# Altium PCB G30 V21.PcbDoc
Units mm, origin at the board's own origin, x right, y up, seen from the top; angles counter-clockwise.
Board outline 71.5 x 45 mm, 2 copper layers (Top Layer, Bottom Layer); 103 components, 105 nets, 360 pads, 213 vias.
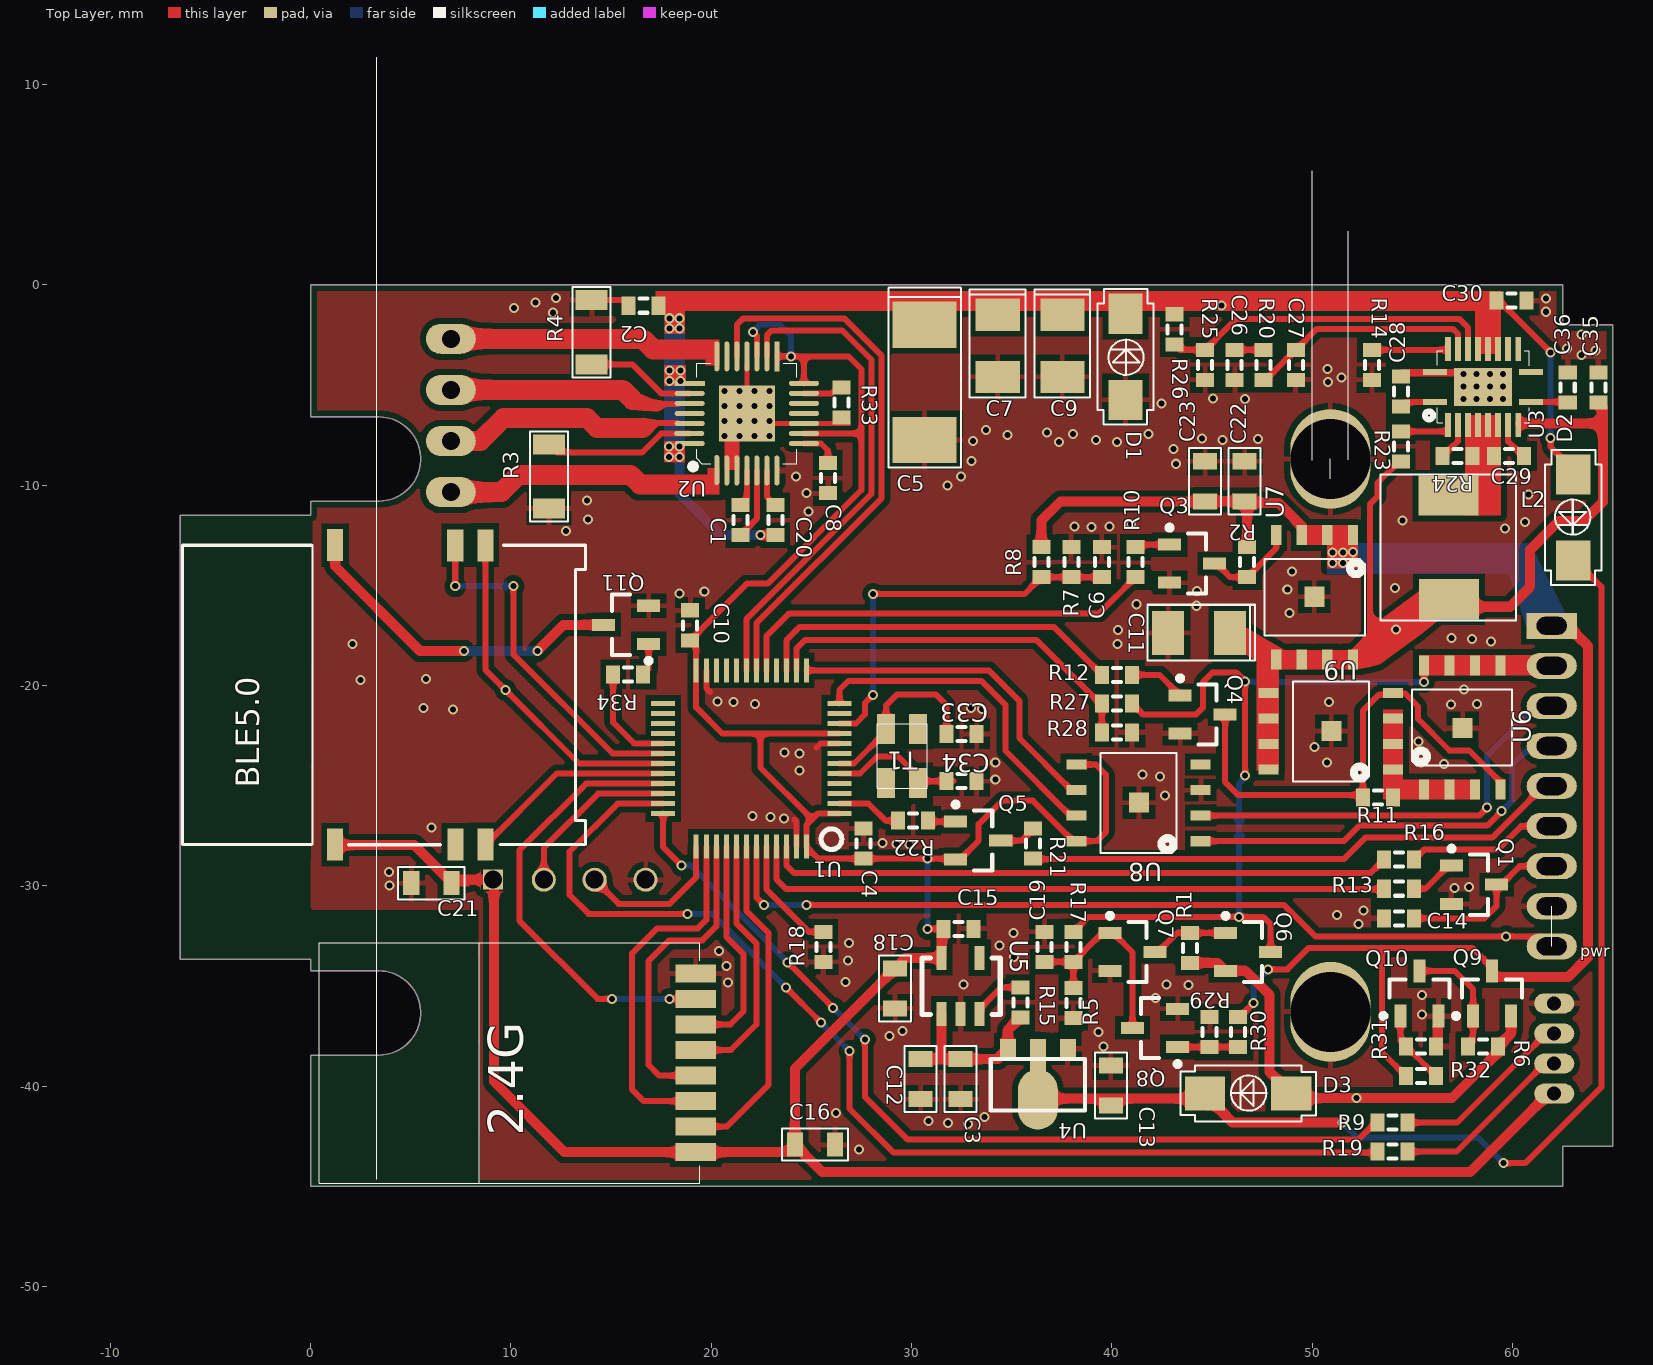
[diagram p0: Top Layer view]
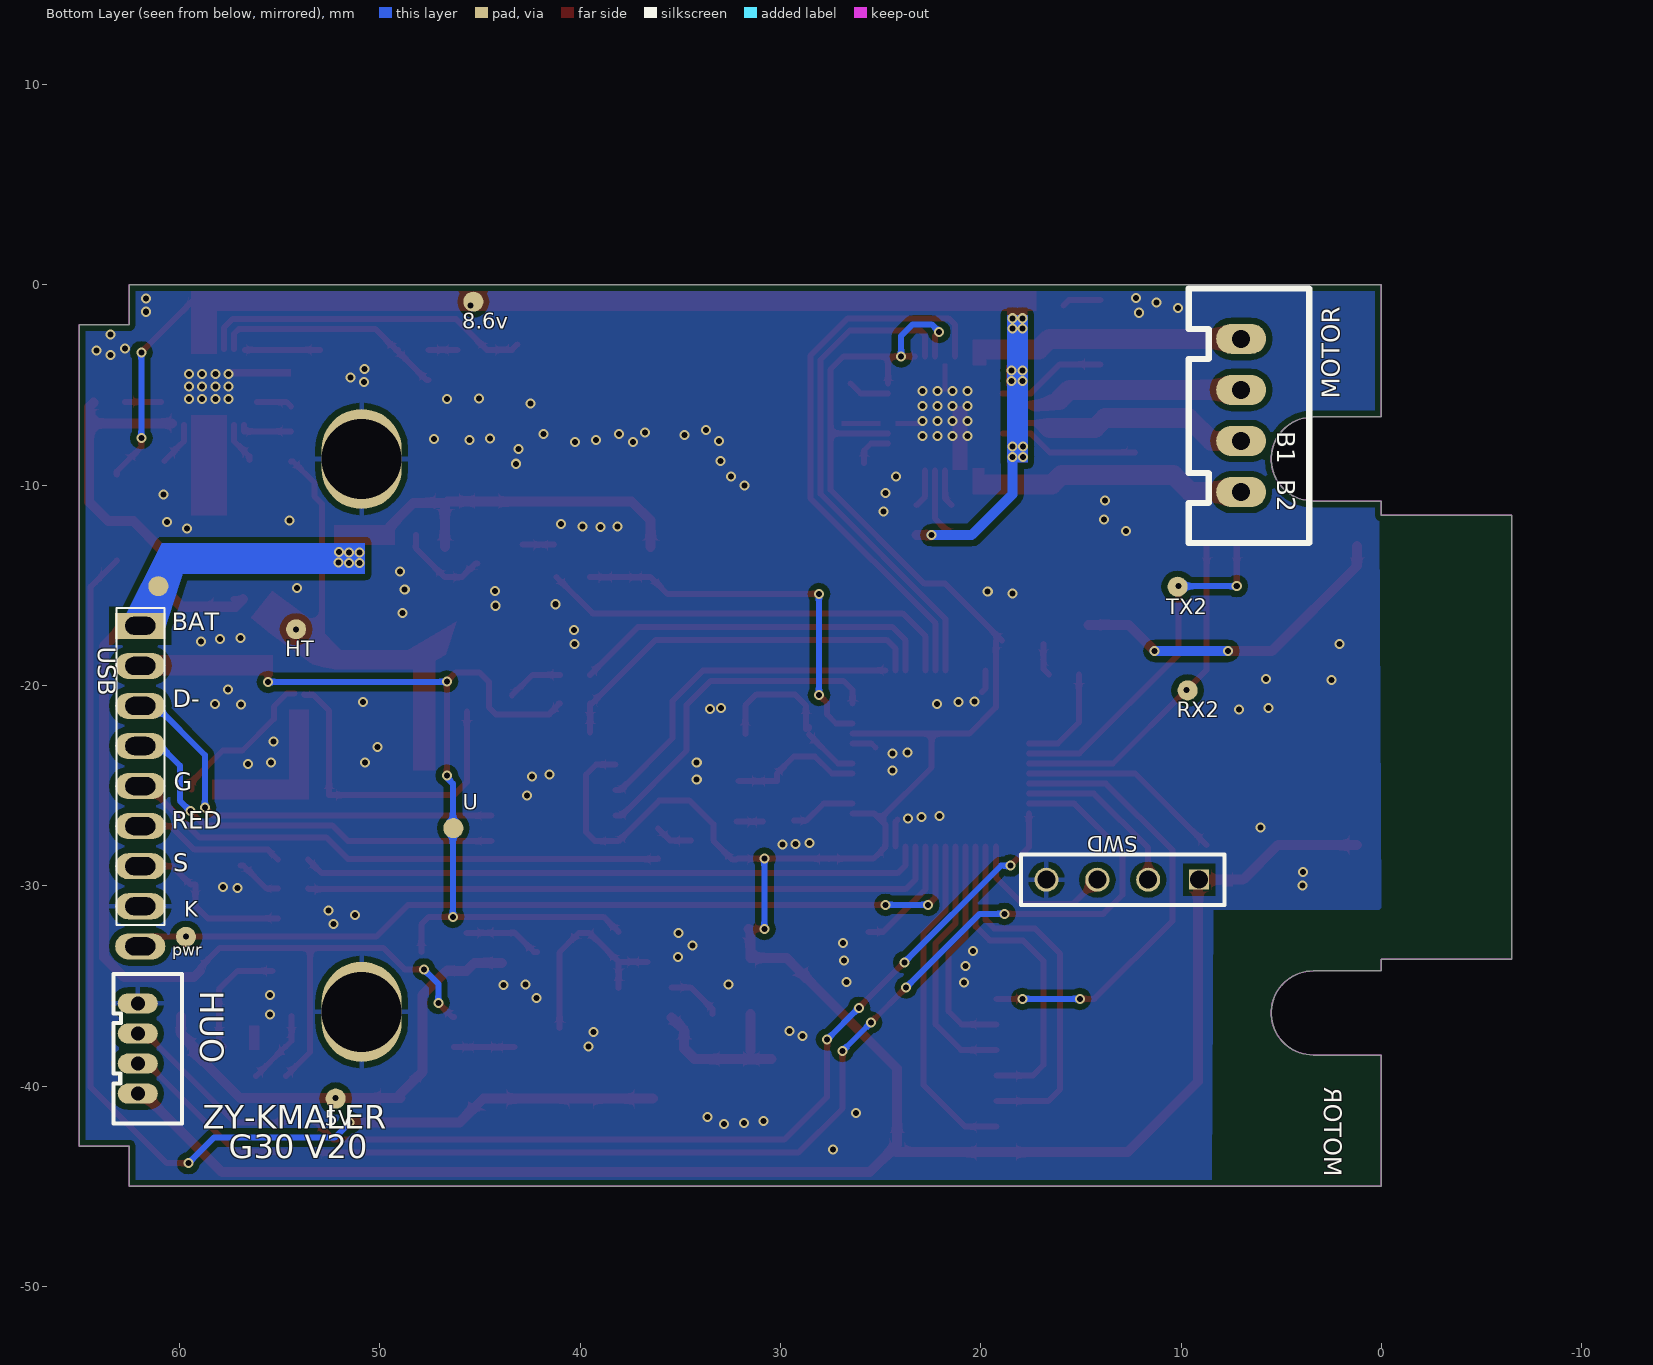
[diagram p1: Bottom Layer view, seen from below]

## Layer stack, top to bottom
Top Layer: signal copper 0.0356
Dielectric: dielectric 0.32, FR-4, Dk 4.8
Bottom Layer: signal copper 0.0356

## Board outline
0,-34.25 0,-33.675 -6.5,-33.675 -6.5,-11.5 0,-11.5 0,-10.8 3.4,-10.8 ccw(c3.4,-8.7) 3.4,-6.6 0,-6.6 0,0 62.5,0 62.5,-2 65,-2 65,-43 62.5,-43 62.5,-45 0,-45 0,-38.45 3.4,-38.45 ccw(c3.4,-36.35) 3.4,-34.25

## Design rules (kind name [scope] priority, off if disabled: settings)
Clearance Clearance_1 [All vs InPolygon] p1: gap=0.3
Clearance [All] p2: gap=0.2
PolygonConnect PolygonConnect_1 [IsVia] p1: connectstyle=Direct reliefconductorwidth=0.254 reliefentries=4 polygonreliefangle="90 Angle"
PolygonConnect [All] p2: connectstyle=Relief reliefconductorwidth=0.254 reliefentries=4 polygonreliefangle="90 Angle"
RoutingVias [All] p1: holewidth=0.711 width=1.27 viastyle="Through Hole" minholewidth=0.711 minwidth=1.27 maxholewidth=0.711 maxwidth=1.27
SilkscreenOverComponentPads SilkToSolderMaskClearance [IsPad] p1: minsilkscreentomaskgap=0.254
SolderMaskExpansion [All] p1: expansion=0.102
Width [All] p1: maxlimit=1 minlimit=0.2 preferedwidth=0.5
27 further rules are at their usual default settings.

## Classes and differential pairs
component class E310: C1 C4 C12 C22 C23 C26 C27 C28 C29 C30 C35 C36 L2 Q1 R3 R4 R7 R8 R14 R20 R23 R24 R25 R26 SWD

## Components (designator, comment, footprint, x,y, rotation, side; value= is the part's Value field where it differs from the comment)
5V "" "TEST VIA" 52.2,-38.725 r270 bottom (schematic designator nrest)
8.6v "" "TEST VIA" 45.325,1.05 r270 bottom (schematic designator nrest)
C1 "10nF/25V" J1-0603 21.45,-11.75 r270 top
C2 "100nF/25V" J1-0603 16.625,-1.05 r180 top
C3 "22uF/25V" C0805 32.45,-38.65 r270 top
C4 "100nF/25V" J1-0603 27.6,-27.9 r90 top
C5 "C型 100UF 16V" TC-C 29.1,-1.6 r270 top
C6 "10pF" J1-0603 39.5,-13.85 r90 top
C7 "b型 47UF 16V" TC-B 34.3,-1.075 r270 top
C8 "2.2uF/16V" J1-0603 25.825,-9.65 r90 top
C9 "b型 47UF 16V" TC-B 37.525,-1.075 r270 top (schematic designator C7)
C10 "10nF/25V" J1-0603 18.95,-17 r90 top (schematic designator C4)
C11 "b型 47UF 16V" TC-B 46.325,-17.375 r180 top (schematic designator C7)
C12 "22uF/25V" C0805 30.45,-38.65 r270 top
C13 "22uF/25V" C0805 39.95,-40.975 r90 top (schematic designator C12)
C14 "1uF/16V" J1-0603 54.325,-31.625 r180 top
C15 "1uF/25V" J1-0603 32.35,-32.15 r0 top (schematic designator C1)
C16 "22uF/25V" C0805 26.175,-42.925 r180 top (schematic designator C12)
C18 "22uF/25V" C0805 29.175,-36.125 r90 top (schematic designator C12)
C19 "10nF/25V" J1-0603 36.625,-33.05 r90 top (schematic designator C1)
C20 "100nF/25V" J1-0603 23.2,-11.75 r90 top (schematic designator C1)
C21 "22uF/25V" C0805 7.025,-29.875 r180 top (schematic designator C12)
C22 "22uF/25V" C0805 46.625,-10.812 r90 top
C23 "22uF/25V" C0805 44.65,-10.812 r90 top
C26 "1nF/25V" J1-0603 46.125,-4 r270 top
C27 "10pF/16V" J1-0603 49.175,-4 r270 top
C28 "2.2uF/16V" J1-0603 54.425,-5.325 r90 top
C29 "100nF/25V" J1-0603 59.825,-8.55 r0 top
C30 "1uF/25V" J1-0603 59.95,-0.8 r0 top
C33 "20pF/16V" J1-0603 32.5,-22.425 r180 top (schematic designator C10)
C34 "20pF/16V" J1-0603 32.5,-24.775 r180 top (schematic designator C10)
C35 "100nF/25V" J1-0603 64.275,-5.125 r90 top
C36 "47nF/25V" J1-0603 62.75,-5.125 r270 top
D1 "SMJ8.5A" SMA 37.55,-8.6 r90 top
D2 "SMJ8.5A" SMA 66.15,-6.625 r270 top (schematic designator D1)
D3 "SMJ8.5A" SMA 51.8,-43.5 r180 top (schematic designator D1)
HT "" "TEST VIA" 54.175,-15.3 r270 bottom (schematic designator nrest)
HUO "K" ZH1.5-4P 62.075,-35.875 r270 bottom
K "" "TEST VIA" 59.671,-30.65 r270 bottom (schematic designator nrest)
L2 "5.6uH/6A" L0603 64.975,-15.475 r180 top
MOTOR "K" HEADER2.54-4P 3.625,-12.9 r90 bottom
nrest "" "TEST VIA" 61.05,-13.15 r270 bottom
Q1 "S8050" SOT-23_N 58.075,-29.95 r0 top
Q3 "SS8050" SOT-23_N 44,-13.925 r0 top (schematic designator Q1)
Q4 "S8050" SOT-23_N 44.525,-21.45 r0 top (schematic designator Q1)
Q5 "A03401" SOT-23_N 33.325,-27.75 r0 top (schematic designator Q1)
Q6 "A03401" SOT-23_N 46.8,-33.3 r0 top (schematic designator Q1)
Q7 "SS8050" SOT-23_N 41.025,-33.3 r0 top (schematic designator Q1)
Q8 "SS8050" SOT-23_N 42.15,-37.1 r180 top (schematic designator Q1)
Q9 "A03401" SOT-23_N 58.975,-35.375 r90 top (schematic designator Q1)
Q10 "SS8050" SOT-23_N 55.35,-35.375 r90 top (schematic designator Q1)
Q11 "SS8050" SOT-23_N 15.75,-16.975 r180 top (schematic designator Q1)
R1 "100K" J1-0603 43.9,-33.1 r90 top (schematic designator R13)
R2 "100K" J1-0603 46.75,-13.85 r90 top (schematic designator R13)
R3 "0.33R" R1206 11.9,-10.375 r90 top
R4 "0.33R" R1206 14.025,-3.175 r90 top
R5 "220K" J1-0603 38.075,-35.85 r90 top (schematic designator R13)
R6 "100K" J1-0603 58.525,-38.025 r180 top (schematic designator R13)
R7 "22K" J1-0603 37.975,-13.85 r270 top
R8 "100K" J1-0603 36.475,-13.85 r90 top
R9 "100K" J1-0603 54,-41.825 r180 top (schematic designator R7)
R10 "1K" J1-0603 41.175,-13.85 r90 top (schematic designator R13)
R11 "100K" J1-0603 53.275,-25.6 r0 top (schematic designator R13)
R12 "1K" J1-0603 40.25,-19.475 r0 top (schematic designator R13)
R13 "1K" J1-0603 54.325,-30.15 r0 top
R14 "560K" J1-0603 52.975,-4 r270 top
R15 "1K" J1-0603 35.425,-35.825 r270 top (schematic designator R13)
R16 "1K" J1-0603 54.325,-28.7 r180 top (schematic designator R13)
R17 "1M" J1-0603 38.075,-33.05 r270 top (schematic designator R13)
R18 "100K" J1-0603 25.6,-33.05 r90 top (schematic designator R13)
R19 "100K" J1-0603 54,-43.275 r180 top (schematic designator R7)
R20 "24.9K" J1-0603 47.575,-4 r90 top
R21 "160R" J1-0603 36.05,-27.9 r90 top (schematic designator R13)
R22 "1K" J1-0603 30.075,-26.75 r180 top (schematic designator R13)
R23 "1M" J1-0603 54.425,-8.075 r90 top
R24 "270K" J1-0603 57.25,-8.55 r180 top
R25 "40.2K" J1-0603 44.65,-4 r90 top
R26 "270K" J1-0603 43.125,-2.225 r90 top
R27 "100K" J1-0603 40.25,-20.9 r180 top (schematic designator R13)
R28 "200K" J1-0603 40.25,-22.35 r0 top (schematic designator R13)
R29 "220K" J1-0603 44.875,-37.3 r90 top (schematic designator R13)
R30 "1M" J1-0603 46.3,-37.3 r90 top (schematic designator R13)
R31 "220K" J1-0603 55.425,-38.025 r0 top (schematic designator R13)
R32 "1M" J1-0603 55.425,-39.5 r0 top (schematic designator R13)
R33 "1K" J1-0603 26.5,-5.875 r270 top (schematic designator R5)
R34 "1K" J1-0603 15.85,-19.45 r180 top (schematic designator R13)
RX2 "" "TEST VIA" 9.675,-18.35 r270 bottom (schematic designator nrest)
SWD "" HDR1X4 9.1,-29.7 r0 bottom
T1 "3225" CRYSTAL-SMT 30.775,-21.925 r270 top
TX2 "" "TEST VIA" 10.175,-13.175 r270 bottom (schematic designator nrest)
U "" "TEST VIA" 46.325,-25.225 r270 bottom (schematic designator nrest)
U1 "STM32F030C8" ST-LQFP48 25.975,-27.65 r180 top
U2 "TMC2208-28P" QFN28 25.15,-8.925 r180 top
U3 "TPS61088" TPS61088R-21P 60.825,-3.3 r270 top (schematic designator U6)
U4 "HT7560" SOT89 39.05,-38.15 r180 top
U5 "K" SOT23-5 30.325,-35.6 r0 top
U6 "K" SOP-8 54.975,-24.875 r90 top
U7 "K" SOP-8 52.625,-12.825 r270 top
U8 "K" SOP-8 44.1,-28.375 r180 top
U9 "K" SOP-8 53.7,-24.8 r180 top
? "K" HEARDER2.0-8P 61.15,-15.45 r270 bottom
? "K" SI24R1 7.425,-44.85 r90 top
? "K" JDY-25M-7 -6.375,-27.95 r90 top

## Footprints (in the part's own frame and the unit in brackets; to place one, negate y for a bottom-side part, rotate by r counter-clockwise, add the part's x,y. Pads: shape width x height; smd on the part's side, far side on the other; paste and mask are expansions set on the pad)
C0805 [mm]
  rect 0.8x1.2 smd: 1(2,0) 2(0,0)
  silkscreen extent -0.65,-0.8 2.65,0.8, body extent -0.3,-0.8 2.27,0.8, height 1.3
CRYSTAL-SMT [mm]
  rect 1.5x0.9 smd: 0(0.25,-0.45) 0(2.95,-2.05) 1(2.95,-0.45) 2(0.25,-2.05)
  silkscreen extent 0,-2.5 3.2,0
HDR1X4 [mm] "Connector; Header; 4 Position"
  rect 1x1 hole 0.9: 1(0,0)
  round 1.2 hole 0.9: 2(2.54,0) 3(5.08,0) 4(7.62,0)
  silkscreen extent -1.27,-1.27 8.89,1.27
HEADER2.54-4P [mm]
  oval 1.5x2.5 hole 0.9: 1(2.55,3.375) 2(5.1,3.375) 3(7.65,3.375) 4(10.2,3.375)
  silkscreen extent 0,-0.07 12.7,5.93, body extent 0,-0.05 12.7,5.92, height 7
HEARDER2.0-8P [mm]
  rect 1.3x2.5 hole 0.9 slot 1.5 at 90 deg: 1(1.575,-0.8)
  oval 1.3x2.5 hole 0.9 slot 1.5 at 90 deg: 2(3.575,-0.8) 3(5.575,-0.8) 4(7.575,-0.8) 5(9.575,-0.8) 6(11.575,-0.8) 7(13.575,-0.8) 8(15.575,-0.8)
  silkscreen extent 0.68,-1.97 16.5,0.4
J1-0603 [mm] "Chip Resistor, Body 1.6x0.8mm, IPC High Density"
  rect 0.7x0.9 smd: 1(-0.75,0) 2(0.75,0)
  silkscreen extent -0.2,-0.35 0.2,0.35, body extent -0.85,-0.48 0.85,0.48, height 0.9
JDY-25M-7 [mm]
  rect 1.6x0.8 smd: 1(0.005,-7.596) 5(0,-13.6) 6(0.005,-15.096) 19(14.94,-15.096) 20(14.94,-13.596) 24(14.95,-7.6)
  silkscreen extent 0,-20.1 14.95,0.02, body extent 0,-20.1 14.95,0, height 1.6
L0603 [mm] "inductance"
  rect 3x2 smd: 1(8.15,0.225) 2(8.175,-4.95)
  silkscreen extent 4.8,-6 11.58,1.28, body extent 4.8,-6 11.58,1.28, height 2.7
QFN28 [mm]
  rect 2.8x2.8 smd: 0(3.375,-2.5)
  oval 0.25x1.5 smd: 1(4.875,0.325) 2(4.375,0.35) 3(3.875,0.35) 4(3.375,0.35) 5(2.875,0.35) 6(2.375,0.35) 7(1.875,0.35) 16(2.375,-5.35) 17(2.875,-5.35) 18(3.375,-5.35) 19(3.875,-5.35) 20(4.375,-5.35) 21(4.875,-5.35)
  oval 1.5x0.25 smd: 8(0.525,-1) 9(0.525,-1.5) 10(0.525,-2) 11(0.525,-2.5) 12(0.525,-3) 13(0.525,-3.5) 14(0.525,-4) 23(6.225,-3.5) 24(6.225,-3) 25(6.225,-2.5) 26(6.225,-2) 27(6.25,-1.5) 28(6.225,-1)
  rect 0.25x1.5 smd: 15(1.875,-5.35)
  rect 1.5x0.25 smd: 22(6.225,-4)
  silkscreen extent 0.87,-5 6.2,0.29, body extent 0.87,-5 5.87,0, height 1
R1206 [mm]
  rect 1x1.6 smd: 1(-0.8,0) 2(2.4,0)
  silkscreen extent -1.45,-0.95 3.05,0.95, body extent -1.45,-0.95 3.05,0.95, height 0.5
SI24R1 [mm]
  rect 0.9x2 smd: 1(1.55,-11.8) 2(2.825,-11.8) 3(4.1,-11.8) 4(5.375,-11.8) 5(6.65,-11.8) 6(7.925,-11.8) 7(9.2,-11.8) 8(10.475,-11.8)
  silkscreen extent 0,-12 12,7, body extent -0.03,-12 12,7.02, height 2
SMA [mm]
  rect 2x1.7 smd: 1(2.85,-3.125) 2(7.15,-3.125)
  silkscreen extent 1.63,-4.52 8.37,-1.73, body extent 2.35,-4.52 7.65,-1.73, height 1.9
SOP-8 [mm] "ESOP8L"
  rect 1x0.51 smd: 1(-0.325,-0.6) 2(-0.325,-1.875) 3(-0.325,-3.15) 4(-0.325,-4.425) 5(5.875,-4.425) 6(5.875,-3.15) 7(5.875,-1.875) 8(5.875,-0.6)
  rect 1x1 smd: 2(2.75,-2.525)
  silkscreen extent 0.87,-5 4.68,0, body extent 0.87,-5 4.68,0, height 1.75
SOT23-5 [mm]
  rect 0.5x1.2 smd: 1(1.175,-0.8) 2(2.125,-0.8) 3(3.075,-0.8) 4(3.075,2) 5(1.175,2)
  silkscreen extent 0.2,-0.82 4.1,2, body extent 0.23,-0.82 4.1,2, height 1.3
SOT89 [mm]
  rect 0.8x1 smd: 1(1.25,0) 3(4.25,0)
  oval 2x3 smd: 2(2.75,2.525)
  rect 0.8x2 smd: 2(2.75,0.5)
  silkscreen extent 0.4,0.5 5.1,3.08, body extent 0.4,0.5 5.1,3.08, height 1.4
SOT-23_N [mm] "SOT23, 3-Leads, Body 2.9x1.3mm, Pitch 0.95mm, Lead Span 2.5mm, IPC Medium Density"
  rect 1.15x0.6 smd: 1(-1.125,0.95) 2(-1.125,-0.95) 3(1.125,0)
  silkscreen extent -1.25,-1.5 0.7,1.92, body extent -0.7,-1.5 0.7,1.5, height 1.1
ST-LQFP48 [mm]
  rect 1.2x0.25 smd: 1(-0.425,-1.25) 2(-0.425,-1.75) 3(-0.425,-2.25) 4(-0.425,-2.75) 5(-0.425,-3.25) 6(-0.425,-3.75) 7(-0.425,-4.25) 8(-0.425,-4.75) 9(-0.425,-5.25) 10(-0.425,-5.75) 11(-0.425,-6.25) 12(-0.425,-6.75) 25(8.375,-6.75) 26(8.375,-6.25) 27(8.375,-5.75) 28(8.375,-5.25) 29(8.375,-4.75) 30(8.375,-4.25) 31(8.375,-3.75) 32(8.375,-3.25) 33(8.375,-2.75) 34(8.375,-2.25) 35(8.375,-1.75) 36(8.375,-1.25)
  rect 0.25x1.2 smd: 13(1.225,-8.4) 14(1.725,-8.4) 15(2.225,-8.4) 16(2.725,-8.4) 17(3.225,-8.4) 18(3.725,-8.4) 19(4.225,-8.4) 20(4.725,-8.4) 21(5.225,-8.4) 22(5.725,-8.4) 23(6.225,-8.4) 24(6.725,-8.4) 37(6.725,0.4) 38(6.225,0.4) 39(5.725,0.4) 40(5.225,0.4) 41(4.725,0.4) 42(4.225,0.4) 43(3.725,0.4) 44(3.225,0.4) 45(2.725,0.4) 46(2.225,0.4) 47(1.725,0.4) 48(1.225,0.4)
  silkscreen extent -0.54,-0.49 0.49,0.54, body extent 0.23,-7.8 7.75,-0.2, height 1.5
TC-B [mm] "Tantalum capacitor"
  rect 1.6x2.2 smd: 1(0.425,0) 2(3.525,0)
  silkscreen extent -0.82,-1.4 4.55,1.38, body extent -0.35,-1.4 4.55,1.38, height 1.65
TC-C [mm]
  rect 2.3x3.2 smd: 1(0.4,1.55) 2(6.15,1.55)
  silkscreen extent -1.45,-0.25 7.52,3.37
"TEST VIA" [mm]
  round 1 smd: 1(1.9,0)
TPS61088R-21P [mm] "TPS61088"
  rect 0.29x1.2 smd: 1(2.55,-4.7) 10(2.55,0.1) 11(1.05,0.1) 20(1.05,-4.7)
  rect 1.2x0.29 smd: 2(3.7,-4.05) 3(3.7,-3.55) 4(3.7,-3.05) 5(3.7,-2.55) 6(3.7,-2.05) 7(3.7,-1.55) 8(3.7,-1.05) 9(3.7,-0.55) 12(-0.1,-0.55) 13(-0.1,-1.05) 14(-0.1,-1.55) 15(-0.1,-2.05) 16(-0.1,-2.55) 17(-0.1,-3.05) 18(-0.1,-3.55) 19(-0.1,-4.05)
  rect 1.9x2.9 smd: 21(1.8,-2.3)
  silkscreen extent 0,-5.2 3.6,0, body extent 0,-4.6 3.6,0, height 1.1
ZH1.5-4P [mm]
  oval 1x2 hole 0.7: 0(0,0) 1(1.5,0) 2(3,0) 3(4.5,0)
  silkscreen extent -1.48,-1.2 6,2.2, body extent -1.48,-1.2 6,2.17, height 5

## Part data
5V 8.6v HT K nrest RX2 TX2 U: library part "TEST VIA"
C1 C2 C6 C8 C15 C19 C20: library part Cap, "Capacitor"
C3 C4 C10 C12 C13 C14 C16 C18 C21 C22 C23 C26 C27 C28 C29 C30 C33 C34 C35 C36: library part CAP, "Capacitor"
C5 C7 C9 C11: library part "CAPACITOR POL", "Capacitor"
D1 D2 D3: library part "Diode 1N4448", "High Conductance Fast Diode"
L2 R1 R2 R5 R6 R10 R11 R12 R13 R14 R15 R16 R17 R18 R20 R21 R22 R23 R24 R25 R26 R27 R28 R29 R30 R31 R32 R34: library part Res1, "Resistor"
Q1 Q3 Q4 Q5 Q6 Q7 Q8 Q9 Q10 Q11: library part "Header 3", "Header, 3-Pin"
R3 R4 R7 R8 R9 R19: library part RES1
R33: library part Res3, "Resistor"
SWD: library part "4 HEADER", "4 Pin Header"

## Free pads (board coordinates)
  oval 4x5 hole 4: 1(50.9,-36.3) 1(50.9,-8.7)
  oval 2.5x1.3 hole 0.9 slot 1.5 at 0 deg: 9(61.95,-33.025)

## Via types
v1: diameter 0.5, hole 0.3, Top Layer to Bottom Layer, tented both sides, 213 vias

## Nets (pads, with @x,y where several pads share a name; then routed paths per layer and width w, separated by ;. In a path a pad name is that pad's centre, name@x,y a point inside that pad or via, vN(x,y) a via of type N, cw(c..) or ccw(c..) an arc to the next point about the centre after c; other vN are vias at no path point)
3.3V: ?.1@1.221,-27.945 ?.1@19.225,-43.3 C4.1 C10.1 C15.1 C16.1 C18.1 C21.2 HUO.3 Q5.2 SWD.1 U1.1 U1.9 U1.24 U1.48 U2.9 U2.14 U2.15 U2.17 U5.5 U8.5 U8.8 | length 167.4
  Top Layer w0.3: C10.1 21.775,-14.925 22.811,-14.925 27.5,-10.236 27.5,-7.425 ; C10.1@19.25,-17.775 U1.24 19.25,-21.1 20.55,-22.4 22.45,-22.4 ; v1(22.075,-2.35) 22.275,-2.55 U2.17 ; U2.15 26.85,-3.575 27.5,-4.225 27.5,-7.425 ; U2.9 27.5,-7.425 ; U2.14 24.625,-3.575 ; U1.1 25.325,-26.4 25.038,-26.687 ; U1.9 22.45,-22.4 ; C4.1@27.575,-28.675 C4.1 ; v1(30.8,-32.15) C15.1 ; Q5.2@32.15,-28.65 C4.1 ; Q5.2 32.4,-28.7 33.35,-27.75 33.35,-26.925 34.525,-25.75 36.05,-25.75 38.075,-27.775 U8.8 39.25,-27.775 39.7,-27.325 39.7,-24.45 39.2,-23.95 U8.5 ; 22.45,-22.4 22.45,-24.1 25.038,-26.687 ; 25.038,-26.687 24.75,-26.975 U1.48 25.35,-28.65 C4.1
  Top Layer w0.5: ?.1@1.221,-27.97 5.17,-27.97 6.9,-29.7 SWD.1 9.15,-29.7 9.15,-39.775 12.675,-43.3 19.225,-43.3 C16.1@24.2,-43.3 ; C15.1 31.5,-32.25 U5.5 29.7,-33.6 C18.1 24.175,-39.125 C16.1 25.55,-44.3 57.875,-44.3 61.8,-40.375 HUO.3
  Bottom Layer w0.3: v1(22.075,-2.35) 22.45,-1.975 23.4,-1.975 23.975,-2.55 v1(23.975,-3.575) ; v1(30.8,-32.15) v1(30.8,-28.65)
ADC1: C6.1 R7.2 R8.1 U1.10 | length 19.4
  Top Layer w0.3: U1.10 27.225,-21.9 27.675,-21.45 27.675,-20.875 v1(28.075,-20.475) ; v1(28.075,-15.437) 35.637,-15.437 R8.1 R7.2 C6.1
  Bottom Layer w0.3: v1(28.075,-20.475) v1(28.075,-15.437)
BLE_GND: ?.24 Q11.3 | length 16.7
  Top Layer w0.5: ?.24@1.221,-13.035 1.221,-14.046 5.45,-18.275 v1(7.65,-18.275) ; v1(11.325,-18.275) 12.625,-16.975 Q11.3
  Bottom Layer w0.5: v1(7.65,-18.275) v1(11.325,-18.275)
CE: ?.2@19.225,-42.025 U1.42 | length 16.8
  Top Layer w0.3: ?.2@19.225,-42.025 20.775,-42.025 22.85,-39.95 22.85,-32.35 21.75,-31.25 U1.42
CS: 
CSN: ?.3@19.225,-40.75 U1.38 | length 18.3
  Top Layer w0.3: ?.3@19.225,-40.75 16.625,-40.75 16.05,-40.175 16.05,-33.375 17.3,-32.125 19.325,-32.125 19.75,-31.7 U1.38
D+: ?.4@61.95,-23.025 U8.1 | length 20.5
  Top Layer w0.3: U8.1 51.575,-27.775 52.35,-27 58.725,-27 v1(59.45,-26.275)
  Bottom Layer w0.3: v1(59.45,-26.275) 59.975,-25.75 59.975,-24 60.95,-23.025 ?.4@61.95,-23.025
D-: ?.3@61.95,-21.025 U8.2@44.425,-26.5 | length 21.3
  Top Layer w0.3: U8.2@44.425,-26.5 58.325,-26.5 v1(58.725,-26.1)
  Bottom Layer w0.3: v1(58.725,-26.1) 58.725,-23.475 61.175,-21.025 ?.3@61.95,-21.025
DIAG: 
DIR: U1.18 U2.19 | length 28
  Top Layer w0.3: U2.19 21.275,-2 21.6,-1.675 26.632,-1.675 28.5,-3.543 28.5,-10.65 22.25,-16.9 U1.18
EN: 
FLOW: 
GND: ?.8 C2.2 C3.1 C4.2 C5.2 C6.2 C7.2 C8.1 C9.2 C10.2 C11.2 C12.1 C13.1 C14.2 C15.2 C16.2 C18.2 C19.2 C21.1 C22.1 C23.1 C26.2 C27.2 C28.2 C30.2 C33.1 C34.1 C35.2 C36.1 D1.1 HUO.0 pad.1 Q1.2 Q3.2 Q4.2 Q7.2 Q8.2 Q10.2 Q11.2 R3.1 R4.2 R5.1 R7.1 R14.2 R18.1 R25.1 R28.2 R29.2 R31.2 R33.2 SWD.4 U1.8 U1.23 U1.47 U2.0 U2.2 U2.3 U2.7 U2.10 U2.18 U3.20 U3.21 U4.1 U5.2 U6.2@57.5,-22.125 U7.2@50.1,-15.575 U8.2@41.35,-25.85 U8.3 U9.2@50.95,-22.275 | length 5.7
  Top Layer w0.3: R4.2 15.6,-0.775 C2.2 ; U1.23 19.75,-20.15 19.925,-20.325 ; 24.15,-26.7 24.25,-26.8 U1.47 ; 25.25,-23.1 25.45,-22.9 U1.8
  other v1: 27.375,-43.175 32.825,-41.9 31.825,-41.85 30.85,-41.75 33.65,-41.55 26.225,-41.35 39.575,-38.025 28.9,-37.5 39.325,-37.3 29.55,-37.25 55.475,-36.425 42.175,-35.6 55.475,-35.45 43.81,-34.959 32.6,-34.925 42.725,-34.925 20.825,-34.825 26.7,-34.8 20.75,-34 26.825,-33.725 35.1,-33.55 20.375,-33.25 34.375,-32.975 26.875,-32.85 35.075,-32.35 52.3,-31.9 51.225,-31.45 52.55,-31.225 57.1,-30.125 57.825,-30.075 3.95,-30 3.925,-29.325 29.9,-27.95 29.25,-27.925 28.55,-27.875 6.025,-27.1 23.625,-26.65 22.95,-26.575 22.05,-26.525 42.65,-25.5 34.175,-24.7 42.4,-24.55 41.525,-24.45 24.4,-24.25 56.575,-23.925 34.175,-23.85 50.725,-23.85 55.425,-23.85 24.4,-23.4 23.65,-23.35 50.1,-23.075 55.3,-22.8 7.1,-21.2 33.525,-21.175 5.625,-21.125 32.975,-21.125 56.925,-20.95 22.175,-20.925 58.225,-20.925 21.1,-20.825 50.825,-20.825 20.3,-20.8 57.575,-20.2 2.5,-19.725 5.75,-19.675 2.1,-17.925 40.275,-17.925 58.925,-17.8 57.975,-17.675 56.95,-17.625 40.3,-17.225 48.85,-16.375 44.225,-16.025 41.225,-15.95 18.425,-15.425 19.65,-15.325 44.25,-15.3 48.75,-15.225 54.125,-15.15 48.975,-14.325 12.75,-12.3 59.625,-12.175 38.975,-12.1 38.125,-12.075 39.875,-12.075 40.95,-11.95 60.625,-11.85 54.5,-11.775 13.85,-11.725 24.85,-11.325 13.8,-10.775 60.8,-10.475 24.75,-10.4 31.8,-10.025 24.225,-9.575 32.475,-9.575 43.2,-8.937 33,-8.8 43.075,-8.212 37.35,-7.85 40.25,-7.85 33.075,-7.8 39.2,-7.75 45.525,-7.762 47.3,-7.712 44.5,-7.687 20.65,-7.55 21.4,-7.55 22.15,-7.55 22.9,-7.55 34.775,-7.5 38.05,-7.45 41.825,-7.45 36.75,-7.375 33.725,-7.25 20.65,-6.8 21.4,-6.8 22.15,-6.8 22.9,-6.8 20.65,-6.05 21.4,-6.05 22.15,-6.05 22.9,-6.05 42.475,-5.925 46.65,-5.7 57.55,-5.7 58.2,-5.7 58.875,-5.7 59.525,-5.7 45.05,-5.675 20.65,-5.3 21.4,-5.3 22.15,-5.3 22.9,-5.3 57.55,-5.075 58.2,-5.075 58.875,-5.075 59.525,-5.075 50.775,-4.85 51.45,-4.625 57.55,-4.45 58.2,-4.45 58.875,-4.45 59.525,-4.45 50.75,-4.2 63.425,-3.5 64.125,-3.275 62.725,-3.175 63.425,-2.475 12.1,-1.4 61.675,-1.35 10.158,-1.164 11.233,-0.889 61.675,-0.7 12.258,-0.664
GREEN: ?.5@61.95,-25.025 R21.1 | length 27.4
  Top Layer w0.3: R21.1@36.1,-28.65 36.125,-28.675 51.575,-28.675 52.65,-27.6 58.975,-27.6 61.55,-25.025 ?.5@61.95,-25.025
HOU-L: R9.2 U1.36 | length 45.4
  Top Layer w0.3: U1.36 17.6,-28.075 v1(18.525,-29) ; v1(23.812,-33.825) v1(26.081,-36.094) ; v1(27.662,-37.675) 27.662,-40.538 29.8,-42.675 52.3,-42.675 53.15,-41.825 R9.2
  Bottom Layer w0.3: v1(18.525,-29) 18.988,-29 v1(23.812,-33.825) ; v1(26.081,-36.094) v1(27.662,-37.675)
HT7178-EN: 
HUO-R: R19.2 U1.35 | length 55.1
  Top Layer w0.3: U1.35 15.325,-25.9 12.925,-28.3 12.925,-30.45 13.875,-31.4 v1(18.825,-31.4) ; v1(23.725,-35.075) v1(25.475,-36.825) ; v1(26.9,-38.25) 26.9,-41.125 29.1,-43.325 R19.2@53.2,-43.325
  Bottom Layer w0.3: v1(18.825,-31.4) 20.05,-31.4 v1(23.725,-35.075) ; v1(25.475,-36.825) v1(26.9,-38.25)
IRQ: ?.7@19.225,-35.65 U1.33 | length 22.5
  Top Layer w0.3: v1(15.05,-35.65) 14.325,-35.65 10.425,-31.75 10.425,-28.225 13.75,-24.9 U1.33 ; v1(17.925,-35.65) ?.7@19.225,-35.65
  Bottom Layer w0.3: v1(15.05,-35.65) v1(17.925,-35.65)
K1: Q4.1 R12.2 | length 2.8
  Top Layer w0.3: R12.2 42.375,-19.475 Q4.1
K2: K.1 pad.9 U1.43 | length 43.2
  Top Layer w0.3: U1.43 22.25,-30.575 v1(22.625,-30.95) ; v1(24.75,-30.95) 48.575,-30.95 50.15,-32.525 v1(59.675,-32.525) 61.45,-32.525 pad.9
  Bottom Layer w0.3: v1(22.625,-30.95) v1(24.75,-30.95)
K3: 
K_3: Q3.3 R2.1 U7.4 | length 4.6
  Top Layer w0.3: Q3.3 45.225,-13.925 45.9,-14.6 R2.1 48.2,-13.15 U7.4
LED: R16.2 U1.46 | length 31.2
  Top Layer w0.3: U1.46 23.75,-28.975 24.15,-29.375 52.9,-29.375 R16.2
LED2: R22.2 U1.2 | length 3.3
  Top Layer w0.3: U1.2 27.85,-25.9 28.7,-26.75 R22.2
M1: R27.2 R28.1 U1.14 | length 19.3
  Top Layer w0.3: U1.14 24.25,-18.175 24.7,-17.725 36.225,-17.725 39.4,-20.9 R27.2 R28.1
M2: Q5.1 R22.1 | length 1.3
  Top Layer w0.3: R22.1@30.875,-26.8 Q5.1
MISO: ?.6@19.225,-36.925 U1.40 | length 11.2
  Top Layer w0.3: ?.6@19.225,-36.925 20.95,-36.925 21.6,-36.275 21.6,-33.4 20.75,-32.55 U1.40
MOSI: ?.5@19.225,-38.2 U1.41 | length 12.8
  Top Layer w0.3: ?.5@19.225,-38.2 20.975,-38.2 22.25,-36.925 22.25,-32.875 21.25,-31.875 U1.41
MS1: R10.1 U1.17 | length 21.3
  Top Layer w0.3: U1.17 22.75,-17.55 23.9,-16.4 39.375,-16.4 R10.1
MS2: R12.1 U1.15 | length 18.5
  Top Layer w0.3: U1.15 23.75,-17.75 24.425,-17.075 37.1,-17.075 R12.1
NetC3_1: 
NetC8_2: C8.2 U2.8 | length 2
  Top Layer w0.3: U2.8 25.475,-7.925 25.825,-8.275 C8.2
NetC11_1: 
NetC14_1: ?.7@61.95,-29.025 C14.1 Q1.3 | length 8.6
  Top Layer w0.3: C14.1 58.575,-31.625 59.2,-31 Q1.3 59.425,-29.95 60.35,-29.025 ?.7@61.95,-29.025
NetC15_1: C1.1 U2.4 | length 1.9
  Top Layer w0.3: C1.1 21.775,-10.675 U2.4
NetC15_2: C1.2 U2.5 | length 3.6
  Top Layer w0.3: C1.2 22.275,-11.675 U2.5
NetC16_1: 
NetC17_1: 
NetC18_1: 
NetC18_2: R15.1 U5.3 | length 2.7
  Top Layer w0.3: U5.3 33.4,-36.15 34.475,-35.075 R15.1
NetC22_2: ?.1@61.95,-17.025 C22.2 C23.2 nrest.1 Q9.3 R2.2 R8.2 R30.2 R32.1 U7.1 U7.2@50.75,-12.5 U7.3 | length 63.5
  Top Layer w0.3: R30.2 46.375,-36.55 v1(47.075,-35.85) ; v1(47.8,-34.175) 48.75,-34.175 49.825,-33.1 53.475,-33.1 ; R32.1 53.475,-38.3 53.475,-33.1 ; Q9.3 58.975,-34.1 57.975,-33.1 53.475,-33.1
  Top Layer w0.5: R8.2 36.475,-11.775 37.425,-10.825 C23.2@45.25,-10.825 ; C23.2 C22.2 ; R2.2 46.75,-10.887 48.312,-10.887 49.475,-12.05 U7.3 ; Q9.3 59.275,-34.55 62.775,-34.55 63.75,-33.575 63.75,-18.025 62.75,-17.025 ?.1@61.95,-17.025
  Bottom Layer w0.3: v1(47.075,-35.85) 47.075,-34.9 v1(47.8,-34.175)
  other v1: 51,-13.9 51.525,-13.9 52.05,-13.875 51,-13.375 51.525,-13.375 52.025,-13.35
NetC25_2: 
NetC26_1: C26.1 R20.2 | length 1.5
  Top Layer w0.3: C26.1 R20.2
NetC27_1: C27.1 R20.1 U3.18 | length 11.7
  Top Layer w0.3: R20.1 47.675,-4.75 C27.1 ; C27.1@49.075,-3.25 C27.1 ; U3.18 57.275,-2.46 57.015,-2.2 50.225,-2.2 C27.1
NetC28_1: C28.1 U3.1 | length 1.8
  Top Layer w0.3: C28.1 54.65,-5.85 U3.1
NetC29_1: C29.1 L2.2 R24.1 U3.4 U3.5 U3.6 U3.7
NetC29_2: C29.2 U3.8 | length 2.2
  Top Layer w0.3: U3.8 59.775,-7.825 C29.2@60.75,-8.8
NetC33_2: ?.2@61.95,-19.025 Q6.3 R17.1 R27.1 U6.5 U6.6 U6.7 U6.8 U.1 | length 41.1
  Top Layer w0.3: R17.1 38.825,-31.55 v1(46.35,-31.55) 47.55,-31.55 47.925,-31.925 Q6.3 ; R27.1@41.075,-20.9 R27.1 41.55,-21.45 44.2,-21.45 44.55,-21.1 44.55,-19.825 45.025,-19.35 46.2,-19.35 v1(46.65,-19.8) v1(46.65,-24.5) ; v1(55.575,-19.825) U6.8
  Bottom Layer w0.3: v1(46.35,-31.55) 46.35,-24.9 46.65,-24.6 v1(46.65,-24.5) ; v1(46.65,-19.8) 46.675,-19.825 v1(55.575,-19.825)
NetC36_2: C36.2 U3.10 | length 1.8
  Top Layer w0.3: U3.10 C36.2@62.725,-5.85
NetD3_2: 
NetK2_1: 
Netnrest_1: 
NetQ1_1: Q1.1 R13.2 | length 2.4
  Top Layer w0.3: R13.2 55.65,-30.15 56.8,-29 Q1.1
NetR1_1: 
NetR2_1: 
NetR5_1: R33.1 U2.13 | length 2.1
  Top Layer w0.3: U2.13 26,-5.425 R33.1@26.5,-4.925
NetR6_2: 
NetR9_1: R18.2 U1.44 | length 5.9
  Top Layer w0.3: U1.44 22.75,-30.175 24.875,-32.3 R18.2
NetR12_2: R34.2 U1.29 | length 5.3
  Top Layer w0.3: R34.2 15.1,-21.85 16.15,-22.9 U1.29
NetR14_1: R14.1 U3.19 | length 3.8
  Top Layer w0.3: R14.1 U3.19@56.725,-3.25
NetR15_2: HUO.2 R19.1 | length 9.1
  Top Layer w0.3: R19.1 57.2,-43.275 61.6,-38.875 HUO.2
NetR18_2: HUO.1 R9.1 | length 9.2
  Top Layer w0.3: R9.1 57.225,-41.825 61.675,-37.375 HUO.1
NetR23_2: R23.2 U3.2 | length 2.7
  Top Layer w0.3: R23.2 56.77,-7.325 56.775,-7.32 U3.2
NetR24_2: R24.2 U3.3 | length 2.1
  Top Layer w0.3: R24.2@56.5,-8.75 R24.2 ; R24.2@56.55,-8.6 56.55,-8.525 57.275,-7.8 U3.3
NetR25_2: R25.2 R26.1 U3.17 | length 16.6
  Top Layer w0.3: R26.1 43.4,-3.25 R25.2 46.2,-1.7 57.325,-1.7 57.775,-2.15 U3.17
NFA: R3.2 U2.27 | length 7
  Top Layer w0.3: R3.2@12.3,-8.375 16.55,-8.375 17.5,-7.425 U2.27
NFB: R4.1 U2.23 | length 5.5
  Top Layer w0.3: R4.1 16.05,-3.975 17.5,-5.425 U2.23
nSLEEP: 
OA1: MOTOR.3 U2.24 | length 9.3
  Top Layer w1: MOTOR.3 15.575,-5.25 16.075,-5.75
OA2: MOTOR.4 U2.21 | length 13.1
  Top Layer w1: MOTOR.4 16.575,-2.7 17.1,-3.225 19.9,-3.225
OB1: MOTOR.2 U2.26 | length 10.3
  Top Layer w1: MOTOR.2 8.475,-7.8 9.625,-6.65 13.8,-6.65 14.3,-7.15 16.569,-7.15
OB2: MOTOR.1 U2.1 | length 13.4
  Top Layer w1: MOTOR.1 9.525,-10.35 10.375,-9.5 15.975,-9.5 16.45,-9.975 19.9,-9.975
P_USART: 
Q2_1: 
Q2_2: R11.2 U6.1 U6.2@56.85,-25.2 U6.3 U9.1 U9.2@54.025,-22.925 U9.3
Q3_1: Q3.1 R10.2 | length 1.6
  Top Layer w0.3: R10.2@41.3,-12.975 Q3.1
Q3_2: Q4.3 R11.1 U6.4 U9.4 | length 24.2
  Top Layer w0.3: Q4.3@45.65,-21.3 Q4.3 45.65,-24.825 46.3,-25.475 52.525,-25.475 52.525,-21.275 53.325,-20.475 53.75,-20.475 U9.4@53.777,-20.448 ; U9.4@54.25,-20.4 54.625,-20.4 55.275,-21.05 55.275,-21.675 56.85,-23.25 57.825,-23.25 59.4,-24.825 U6.4
Q5-1: Q5.3 R21.2 | length 1.9
  Top Layer w0.3: Q5.3 35.5,-27.75 R21.2@36.1,-27.15
Q6-1: Q8.1 R29.1 R30.1 | length 3
  Top Layer w0.3: Q8.1 R29.1 R30.1
Q6-2: Q6.1 Q7.3 R1.2 | length 3.9
  Top Layer w0.3: Q7.3 42.3,-33.3 43.25,-32.35 R1.2 Q6.1
q7-1: C19.1 Q7.1 Q8.3 R5.2 R17.2 | length 10.5
  Top Layer w0.3: C19.1 R17.2 ; R5.2 R17.2 ; Q8.3 41.025,-33.325 40.05,-32.35 Q7.1 39.525,-32.35 R17.2
Q8-1: Q9.1 Q10.3 R6.2 | length 6
  Top Layer w0.3: Q10.3 57.1,-34.25 58.025,-35.175 Q9.1 58.025,-37.775 R6.2
Q9-1: Q10.1 R31.1 R32.2 | length 3.7
  Top Layer w0.3: Q10.1 54.4,-37.75 R31.1 54.7,-38.025 R32.2
Q11-1: Q11.1 R34.1 | length 1.6
  Top Layer w0.3: R34.1 16.875,-19.175 Q11.1
RED: ?.6@61.95,-27.025 R16.1 | length 7.6
  Top Layer w0.3: R16.1 55.575,-28.2 59.25,-28.2 60.425,-27.025 ?.6@61.95,-27.025
REST: 
RX1: ?.19 RX2.1 U1.31 | length 17
  Top Layer w0.3: ?.19@8.721,-13.035 8.721,-19.221 v1(9.725,-20.225) 13.4,-23.9 U1.31
Rx2: U1.13 U8.6 | length 17
  Top Layer w0.3: U1.13 33.85,-19.25 35.375,-20.775 35.375,-22.625 37.975,-25.225 U8.6
RX3: C13.2 D2.2 D3.2 U4.2 | length 57.8
  Top Layer w0.3: v1(59.55,-43.85) 60.625,-43.85 64.425,-40.05 64.425,-15.075 D2.2@63.125,-13.775
  Top Layer w0.5: U4.2@36.35,-40.625 44.825,-40.625 46.025,-41.825 v1(51.5,-41.825)
  Bottom Layer w0.3: v1(51.5,-41.825) 52.25,-42.575 58.275,-42.575 v1(59.55,-43.85)
SCK: ?.4@19.225,-39.475 U1.39 | length 15.8
  Top Layer w0.3: ?.4@19.225,-39.475 17.4,-39.475 16.875,-38.95 16.875,-33.75 17.9,-32.725 19.55,-32.725 20.25,-32.025 U1.39
SHUTTER: R13.1 U1.45 | length 32.2
  Top Layer w0.3: U1.45 23.25,-29.675 23.75,-30.175 53.55,-30.175 R13.1
SPREED: 
STAT: ?.6@8.721,-27.945 U1.32 | length 10.4
  Top Layer w0.3: ?.6@8.721,-27.97 12.291,-24.4 U1.32
STEP: U1.19 U2.16 | length 25.1
  Top Layer w0.3: U1.19 21.75,-16.693 28,-10.443 28,-3.75 26.525,-2.275 23.025,-2.275 22.775,-2.525 U2.16
SWD: SWD.2 U1.34 | length 8.7
  Top Layer w0.3: SWD.2 11.64,-28.11 14.35,-25.4 U1.34
SWK: SWD.3 U1.37 | length 7.6
  Top Layer w0.3: SWD.3 15.38,-30.9 17.925,-30.9 19.25,-29.575 U1.37
T1_INT: C34.2 T1.1 U1.5 | length 6.8
  Top Layer w0.3: U1.5 27.425,-24.4 28.275,-23.55 29.325,-23.55 30.175,-24.4 30.175,-24.775 32.1,-24.775
T1_OUT: C33.2 T1.2 U1.6 | length 8.9
  Top Layer w0.3: U1.6 27.12,-23.9 ; 27.125,-23.9 T1.2@28.58,-22.445 ; T1.2@28.575,-22.15 T1.2@28.575,-22.075 ; T1.2 28.725,-21 29.275,-20.45 31.2,-20.45 31.75,-21 C33.2
TX1: ?.20 TX2.1 U1.30 | length 17.8
  Top Layer w0.3: v1(7.221,-15.046) ?.20@7.221,-13.035 ; v1(10.125,-15.05) 10.125,-18.45 15.075,-23.4 U1.30
  Bottom Layer w0.3: v1@7.225,-15.05 v1(10.125,-15.05)
Tx2: U1.12 U8.7 | length 16.8
  Top Layer w0.3: U1.12 26.4,-20.225 26.85,-19.775 33.475,-19.775 34.675,-20.975 34.675,-23.25 37.925,-26.5 U8.7
TX3: 5V.1 D3.1 Q6.2 Q9.2 R1.1 R6.1 | length 23.4
  Top Layer w0.5: R1.1 45.275,-33.85 Q6.2 46.675,-34.25 47.875,-35.45 47.875,-39.3 D3.1 ; D3.1@48.95,-40.6 56.975,-40.6 59.275,-38.3 R6.1 59.925,-37.375 Q9.2
  other v1: 52.2,-40.6
U4_out: C3.2 C12.2 R15.2 U4.3 U5.1 | length 9
  Top Layer w0.5: C12.2 C3.2 34.25,-38.65 ; 31.5,-38.225 U5.1 ; U4.3@34.775,-38.125 34.25,-38.65 ; R15.2 34.8,-37.2 U4.3 34.3,-38.65 34.25,-38.65
U9_out: C11.1 C35.1 HT.1 L2.1 R23.1 U3.9 U7.5 U7.6 U7.7 U7.8 U9.5 U9.6 U9.7 U9.8 | length 33.3
  Top Layer w0.254: 52.85,-16.575 ccw(c53.487,-16.163) 53.9,-16.8 ; 52.875,-16.85 ccw(c53.2,-16.75) 53.3,-17.075 ; 52.9,-16.325 ccw(c53.45,-16.2) 53.575,-16.75
  Top Layer w0.3: 52.825,-17.95 52.875,-17.9 52.875,-10.95 53.25,-10.575 53.25,-9.9 54.325,-8.825 R23.1 ; L2.1 L2.1@57.3,-15.7 ; C35.1@64.275,-5.95 C35.1
  Top Layer w0.5: L2.1 57.2,-16.075 59.875,-16.075 60.875,-15.075 60.875,-13.225 62.3,-11.8 63.55,-11.8 64.5,-10.85 64.5,-6.925 ; U3.9@60.375,-6.925 64.5,-6.925 ; C35.1 64.5,-6.1 64.5,-6.925
  other v1: 54.175,-17.2
VCC: 8.6v.1 C2.1 C5.1 C7.1 C9.1 C20.1 C30.1 D1.2 D2.1 R26.2 U2.22 U2.28 U3.14 U3.15 U3.16 | length 17.8
  Top Layer w0.3: C30.1@59.275,-0.75 v1(61.9,-3.375) ; v1(61.9,-7.65) 61.9,-8.1 63.125,-9.325 D2.1@63.125,-9.475
  Top Layer w0.5: v1(22.45,-12.5) C20.1
  Bottom Layer w0.3: v1(61.9,-7.65) v1(61.9,-3.375)
  Bottom Layer w0.5: v1(18.425,-8.6) 18.425,-10.475 20.45,-12.5 v1(22.45,-12.5)
  other v1: 17.9,-8.6 17.9,-8.075 18.425,-8.075 17.925,-4.8 18.475,-4.8 17.925,-4.275 18.475,-4.275 17.925,-2.175 18.425,-2.175 17.925,-1.675 18.425,-1.675 45.475,-1.05
VCP: C20.2 U2.6 | length 1.9
  Top Layer w0.3: U2.6 22.775,-10.575 C20.2
pads on no net: ?.5@7.225,-27.95 T1.0 U1.3 U1.4 U1.7 U1.11 U1.16 U1.20 U1.21 U1.22 U1.25 U1.26 U1.27 U1.28 U2.11 U2.12 U2.20 U2.25 U3.11 U3.12 U3.13 U5.4 U8.4

## Polygon pours and split planes (outlines as drawn)
GND on Top Layer "Top Layer-No Net" (solid, remove dead copper, pour order 6): 0,-34.25 0,-33.675 -6.5,-33.675 -6.5,-11.5 0,-11.5 0,-10.8 3.4,-10.8 ccw(c3.4,-8.7) 3.4,-6.6 0,-6.6 0,0 62.5,0 62.5,-2 65,-2 65,-43 62.5,-43 62.5,-45 0,-45 0,-38.45 3.4,-38.45 ccw(c3.4,-36.35) 3.4,-34.25
GND on Bottom Layer "Top Layer-No Net1" (solid, remove dead copper, pour order 8): 0,-34.25 0,-33.675 -6.5,-33.675 -6.5,-11.5 0,-11.5 0,-10.8 3.4,-10.8 ccw(c3.4,-8.7) 3.4,-6.6 0,-6.6 0,0 62.5,0 62.5,-2 65,-2 65,-43 62.5,-43 62.5,-45 0,-45 0,-38.45 3.4,-38.45 ccw(c3.4,-36.35) 3.4,-34.25

## Keep-outs
Keep-Out Layer:
  lines w0.05: 64.975,-43 62.5,-43 62.5,-45 0,-45 0,-38.45 3.4,-38.45 ccw(c3.4,-36.35) 3.4,-34.25 0,-34.25 0,-33.675 -6.5,-33.675 -6.5,-11.5 0,-11.5 0,-10.8 3.4,-10.8 ccw(c3.4,-8.7) 3.4,-6.6 0,-6.6 0,0 25.45,0 62.5,0 62.5,-2 65,-2 65,-43

## Other copper
Top Layer:
  rectangle net U9_out: 47.225,-24.25 48.35,-18.225
  rectangle net U9_out: 47.925,-19.2 52.275,-18.225
  rectangle net Q2_2: 53.625,-25.7 58.375,-24.7
  rectangle net Q2_2: 53.525,-25.7 54.525,-21.2
  rectangle net NetC22_2: 50.725,-14.175 52.275,-12.475
  rectangle net GND: 56,-38.2 56.525,-36.975
  rectangle net VCC: 17.225,-1.325 58.975,-0.325
  rectangle net VCC: 58.125,-3.45 59.425,-0.325
  rectangle net NetC29_1: 57.625,-11.525 59.425,-6.5
  rectangle net NetC22_2: 49.225,-13 52.275,-12
  rectangle net GND: 54.425,-4.575 57.525,-4.2
  rectangle net NetC33_2: 55.325,-19.5 62.025,-18.475
  rectangle net VCC: 17.675,-2.45 18.7,-0.825
  rectangle net VCC: 17.65,-5.05 18.75,-4
  rectangle net VCC: 17.65,-8.875 18.7,-7.8
  rectangle net OA1: 17.575,-6.1 18.425,-5.8
  rectangle net OB1: 17.25,-7.05 18.425,-6.75
  rectangle net GND: 20.65,-9.25 21.4,-6.05
  rectangle net GND: 21.65,-5.325 21.9,-3.925
  rectangle net GND: 22.8,-7.05 24.25,-6.8
  rectangle net GND: 25,-7.05 26.95,-6.8
  rectangle net OB2: 19.8,-10.475 20.4,-9.15
  rectangle net OA2: 19.7,-4.025 20.4,-2.725
  region net U9_out: 51.55,-18.65 52.275,-19.2 52.825,-19.1 53.375,-18.95 55.475,-17.425 56.425,-16.625 55.375,-15.275 53.375,-16.75
  region net U9_out: 46.15,-16.8 46.7,-18.475 47.925,-19.2 48.875,-19.05 48.75,-18.325
  pour cut-out: 0.1,-11.4 -11.55,-11.4 -11.55,-35.975 -9.575,-38.425 0,-33.675
  pour cut-out: 8.4,-31.2 -1.85,-31.2 -3.15,-48.7 -1.175,-51.15 8.5,-47.9
  region net OB1: 17.25,-6.75 17.375,-6.925 17.4,-7.025 17.25,-7.15 16.975,-7.45 16.875,-7.55 16.8,-7.575 16.725,-6.825 16.575,-6.65
  region net OA1: 16.075,-5.75 16.45,-5.45 17.025,-5.7 17.575,-5.8 17.775,-6.1 17.475,-6.275 17.35,-6.325 17.025,-6.325 16.575,-6.3 16.025,-6.25 15.95,-6.225
Bottom Layer:
  rectangle net NetC22_2: 50.725,-14.175 52.625,-13.1
  rectangle net NetC22_2: 50.725,-14.45 60.875,-12.9
  rectangle net VCC: 17.65,-8.875 18.7,-1.5
  region net NetC22_2: 62.85,-16.825 60.75,-17.275 59.725,-14.1 60.175,-13.208 60.874,-12.9 60.887,-12.938
  pour cut-out: 0.1,-11.375 -11.55,-11.35 -11.55,-35.975 -9.575,-38.425 0,-33.675
  pour cut-out: 8.4,-31.2 -1.85,-31.2 -3.15,-48.7 -1.175,-51.15 8.5,-47.9

## Silkscreen, mask and mechanical layers (free items; w line width, h text height)
Top Overlay:
  lines w0.05: 3.294,-44.652 3.294,11.356 ; 50,-8.75 50,5.7 ; 50.9,-9.675 50.9,-8.7 ; 51.8,-8.725 51.8,2.675 ; 61.95,-33.025 61.95,-31.025
  text "BLE5.0" at -2.175,-25.1 h2 r90
  text "pwr" at 63.375,-33.75 h1
  text "2.4G" at 11.2,-42.475 h3 r90
Bottom Overlay:
  lines w0.3: 3.625,-12.9 3.625,-0.2 9.625,-0.2 9.625,-2.2 8.625,-2.2 8.625,-3.7 9.625,-3.7 9.625,-9.4 8.625,-9.4 8.625,-10.9 9.625,-10.9 9.625,-12.9 3.625,-12.9
  text "B1" at 5.5,-7.325 h1.54 r90
  text "B2" at 5.5,-9.7 h1.54 r90
  text "BAT" at 60.375,-17.538 h1.5
  text "USB" at 64.34,-18.079 h1.5 r90
  text "D-" at 60.325,-21.4 h1.5
  text "G" at 60.275,-25.525 h1.5
  text "RED" at 60.375,-27.45 h1.5
  text "S" at 60.3,-29.575 h1.5
  text "pwr" at 60.35,-33.7 h1
  text "ZY-KMALER" at 58.825,-42.525 h2
  text "G30 V20" at 57.525,-44 h2
  text "MOTOR" at 3.15,-44.525 h1.5 r90
Bottom Solder:
  region: 56.225,-3.3 56.225,-6.9 60.825,-6.9 60.825,-3.3
  rectangle: 19.275,-8.925 24.275,-3.925